# EAGLE board aurdino 7 (EAGLE 9.7.0)

Size 116.23 x 136.91 mm. Coordinates in mm from the lower left corner, seen from the top.
Outline: 0,0 116.23,0 116.23,136.91 0,136.91 0,0
Copper layers (1*16): Top 0.035mm / dielectric 1.5mm / Bottom 0.035mm
Design rules "default": minimum track width 6mil, minimum drill 0.35mm, track to track 6mil, track to pad 6mil, pad to pad 6mil, via to via 6mil, smd to smd 6mil, copper to edge 40mil, drill to drill 6mil, minimum pad ring 10mil, minimum via ring 8mil, stop-mask expansion 4mil, vias tented up to drill 0mil, thermal gap 10mil

## Footprints (pad centres in the part's own frame; a part is rotated, then mirrored left to right if it is on the bottom)
BATTERY-GENERIC = drill 1.118 pad 3.15 octagon: + 2.54,0; - -2.54,0
LEDRD254W60D565H860B = drill 0.981 pad 1.581: 1 -1.27,0; 2 1.27,0
MOTOR = drill 1.118 pad 3.15 octagon: + 2.54,0; - -2.54,0
RESAD1016W63L850D250B = drill 0.83 pad 1.43: 1 -5.08,0; 2 5.08,0
TO220BV = drill 1.016 long: D 0,-2.54; G -2.54,-2.54; S 2.54,-2.54
ARDUINO-UNO-R3-SHIELD = drill 1.016 pad 1.88: 3.3V 24.13,-2.54; 5V 24.13,0; A0 24.13,12.7; A1 24.13,15.24; A2 24.13,17.78; A3 24.13,20.32; A4 24.13,22.86; A5 24.13,25.4; AREF -24.13,-13.97; D2 -24.13,20.32; D3 -24.13,17.78; D4 -24.13,15.24; D5 -24.13,12.7; D6 -24.13,10.16; D7 -24.13,7.62; D8 -24.13,3.81; D9 -24.13,1.27; D10 -24.13,-1.27; D11 -24.13,-3.81; D12 -24.13,-6.35; D13 -24.13,-8.89; GND@0 24.13,2.54; GND@1 24.13,5.08; GND@2 -24.13,-11.43; IOREF 24.13,-7.62; NC 24.13,-10.16; RES 24.13,-5.08; RX -24.13,25.4; SCL -24.13,-19.05; SDA -24.13,-16.51; TX -24.13,22.86; VIN 24.13,7.62
TO92 = drill 0.813 octagon: 1 -1.27,0; 2 0,1.905; 3 1.27,0

## Placement (x,y rotation side)
BAT1  9V  [BATTERY-GENERIC]  8.26,84.28 90 top
D1  RED  [LEDRD254W60D565H860B]  72.48,128.86 0 top
M1  MOTOR_HDR  [MOTOR]  93.23,105.43 0 top
R1  10k  [RESAD1016W63L850D250B]  105.11,74.81 90 top
R4  330  [RESAD1016W63L850D250B]  63.59,113.62 90 top
R5  330  [RESAD1016W63L850D250B]  58.51,113.62 90 top
R6  330  [RESAD1016W63L850D250B]  53.43,113.62 90 top
R8  330  [RESAD1016W63L850D250B]  48.35,113.62 90 top
R10  330  [RESAD1016W63L850D250B]  38.19,113.62 90 top
R12  330  [RESAD1016W63L850D250B]  43.27,113.62 90 top
R13  10k  [RESAD1016W63L850D250B]  47.41,79.08 0 top
R16  330  [RESAD1016W63L850D250B]  68.67,113.62 90 top
R18  1k  [RESAD1016W63L850D250B]  73.75,113.62 90 top
R19  330  [RESAD1016W63L850D250B]  33.11,113.62 90 top
T1  NMOSFET  [TO220BV]  107.72,92.07 0 top
T2  NMOSFET  [TO220BV]  56.49,85.26 0 top
U1  ARDUINO-UNO-R3-SHIELD  [ARDUINO-UNO-R3-SHIELD]  51.8,44.3 270 top
U2  TMP36GT9Z_TO92  [TO92]  63.89,4.83 0 top

## Library data of the parts
BAT1 M1 R1 R4-R6 R8 R10 R12 R13 R16 R18 R19 U1 U2 = Tinkercad
D1 = Tinkercad; CATEGORY: Opto-Electronic; SUB-CATEGORY: LED; VALUE: LED_RED
T1 T2 = Tinkercad; CATEGORY: Transistor; SUB-CATEGORY: MOSFET; TYPE: N-Channel

## Nets
BAT1+: BAT1.+ D1.1 M1.+ R4.2 R5.2 R6.2 R8.2 R10.2 R12.2 R16.2 R19.2
BAT1-: BAT1.- R1.1 R13.1 T1.S T2.S U1.GND@0 U1.GND@1 U1.GND@2 U2.1
D1_C: D1.2 R18.2
M1_-: M1.- T1.D
T2_D: R4.1 R5.1 R6.1 R8.1 R10.1 R12.1 R16.1 R18.1 R19.1 T2.D
U1_5V: U1.5V U2.3
U1_A2: U1.A2 U2.2
U1_D3: R13.2 T2.G U1.D3
U1_D6: R1.2 T1.G U1.D6

## Tracks (layer width: path | path; a pad name or v marks a point on that pad's centre or on a via)
BAT1+  (10 unrouted)
BAT1-  (8 unrouted)
D1_C  (1 unrouted)
M1_-  (1 unrouted)
T2_D  (9 unrouted)
U1_5V  (1 unrouted)
U1_A2  (1 unrouted)
U1_D3  (2 unrouted)
U1_D6  (2 unrouted)